# EAGLE board Esquema da PCB (EAGLE 9.5.1)
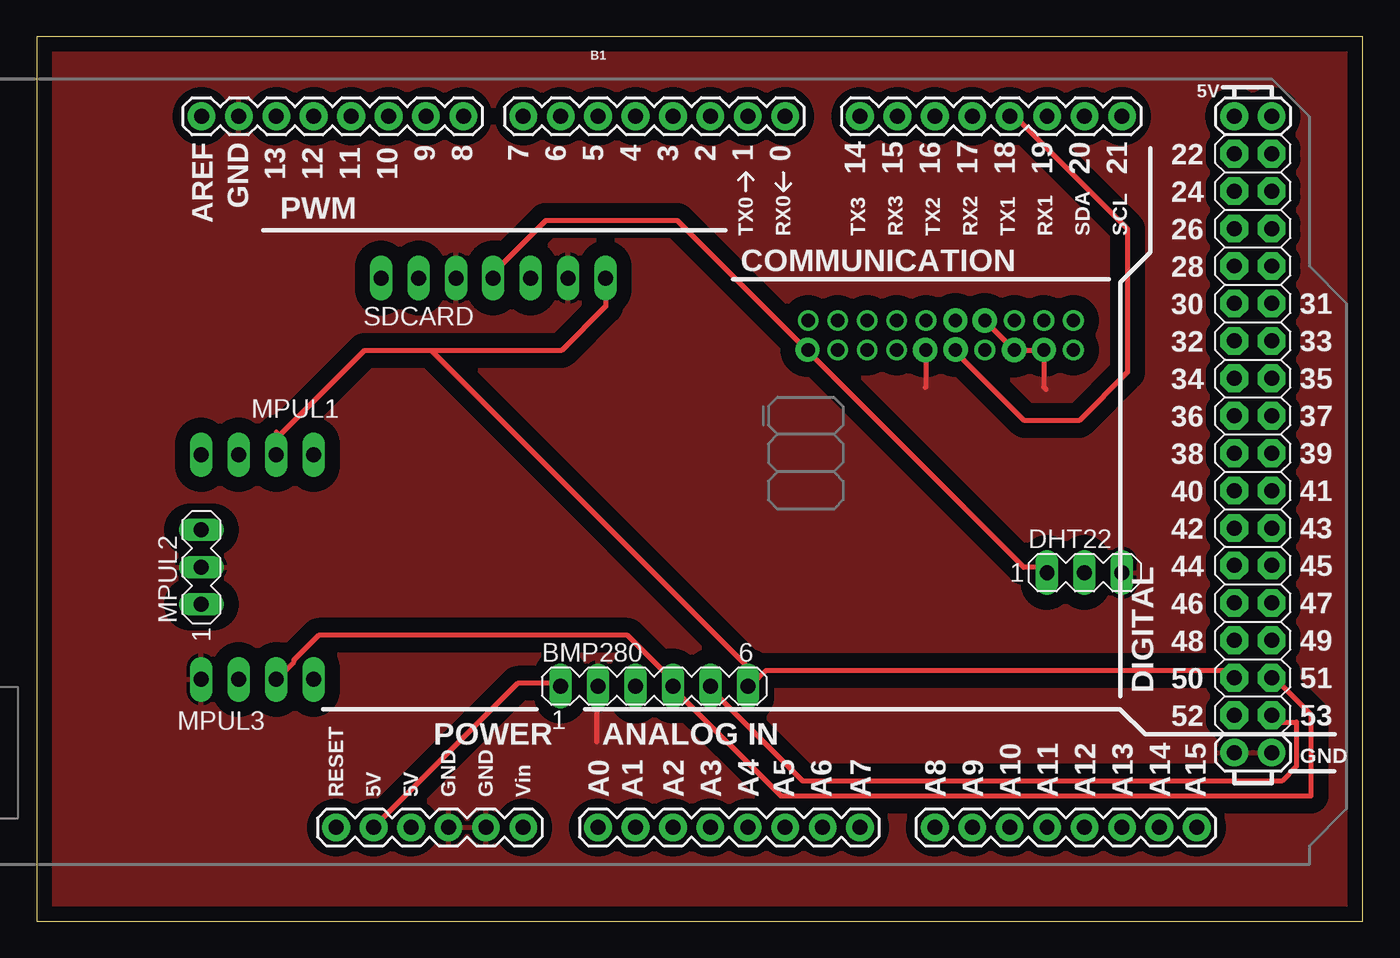
[diagram p0: board, top side]
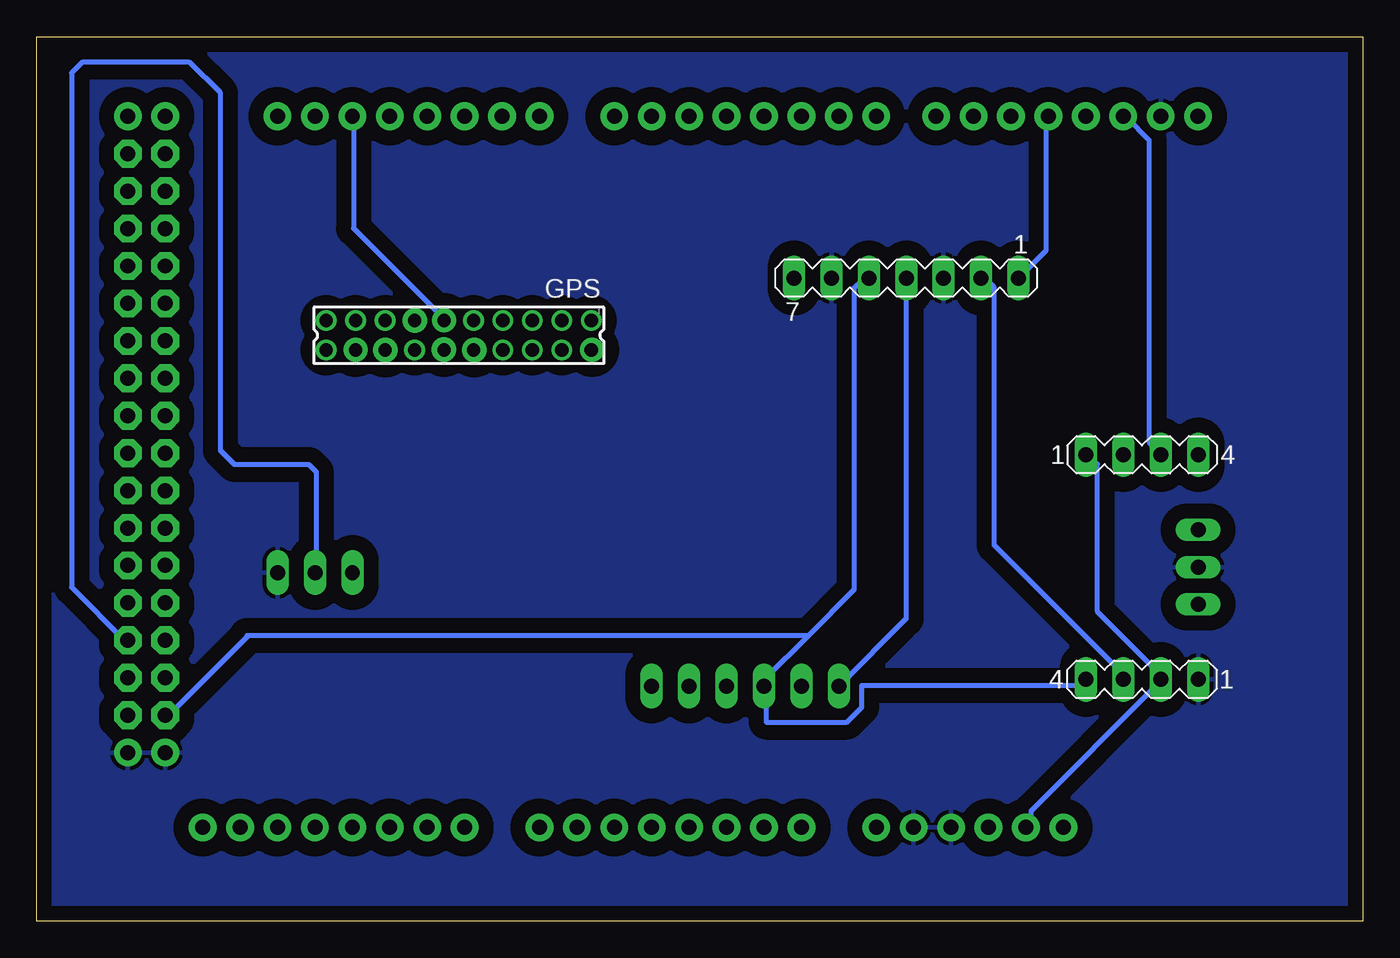
[diagram p1: board, bottom side, seen from below]

Size 90 x 60 mm. Coordinates in mm from the lower left corner, seen from the top.
Outline: 0,0 90,0 90,60 0,60 0,0
Copper layers (1*16): Top 0.035mm / dielectric 1.5mm / Bottom 0.035mm
Design rules "default": minimum track width 6mil, minimum drill 0.35mm, track to track 6mil, track to pad 6mil, pad to pad 6mil, via to via 6mil, smd to smd 6mil, copper to edge 40mil, drill to drill 6mil, minimum pad ring 10mil, minimum via ring 8mil, stop-mask expansion 4mil, vias tented up to drill 0mil, thermal gap 10mil
Net classes: 0 default: width 0.34 mm, clearance 0.4 mm

## Footprints (pad centres in the part's own frame; a part is rotated, then mirrored left to right if it is on the bottom)
ARDUINO_MEGA = drill 1.016 pad 1.88: 0 13.97,24.13; 1 11.43,24.13; 2 8.89,24.13; 3 6.35,24.13; 3.3V -13.97,-24.13; 4 3.81,24.13; 5 1.27,24.13; 5V@0 -11.43,-24.13; 5V@1 44.45,24.13; 5V@2 46.99,24.13; 6 -1.27,24.13; 7 -3.81,24.13; 8 -7.874,24.13; 9 -10.414,24.13; 10 -12.954,24.13; 11 -15.494,24.13; 12 -18.034,24.13; 13 -20.574,24.13; 14 19.05,24.13; 15 21.59,24.13; 16 24.13,24.13; 17 26.67,24.13; 18 29.21,24.13; 19 31.75,24.13; 20 34.29,24.13; 21 36.83,24.13; A0 1.27,-24.13; A1 3.81,-24.13; A2 6.35,-24.13; A3 8.89,-24.13; A4 11.43,-24.13; A5 13.97,-24.13; A6 16.51,-24.13; A7 19.05,-24.13; A8 24.13,-24.13; A9 26.67,-24.13; A10 29.21,-24.13; A11 31.75,-24.13; A12 34.29,-24.13; A13 36.83,-24.13; A14 39.37,-24.13; A15 41.91,-24.13; AREF -25.654,24.13; GND@0 -8.89,-24.13; GND@1 -6.35,-24.13; GND@2 44.45,-19.05; GND@3 46.99,-19.05; GND@4 -23.114,24.13; RESET -16.51,-24.13; VIN -3.81,-24.13 | drill 1.016 pad 1.88 octagon: 22 44.45,21.59; 23 46.99,21.59; 24 44.45,19.05; 25 46.99,19.05; 26 44.45,16.51; 27 46.99,16.51; 28 44.45,13.97; 29 46.99,13.97; 30 44.45,11.43; 31 46.99,11.43; 32 44.45,8.89; 33 46.99,8.89; 34 44.45,6.35; 35 46.99,6.35; 36 44.45,3.81; 37 46.99,3.81; 38 44.45,1.27; 39 46.99,1.27; 40 44.45,-1.27; 41 46.99,-1.27; 42 44.45,-3.81; 43 46.99,-3.81; 44 44.45,-6.35; 45 46.99,-6.35; 46 44.45,-8.89; 47 46.99,-8.89; 48 44.45,-11.43; 49 46.99,-11.43; 50 44.45,-13.97; 51 46.99,-13.97; 52 44.45,-16.51; 53 46.99,-16.51
MA06-1 = drill 1.016 long: 1 -6.35,0; 2 -3.81,0; 3 -1.27,0; 4 1.27,0; 5 3.81,0; 6 6.35,0
MA03-1 = drill 1.016 long: 1 -2.54,0; 2 0,0; 3 2.54,0
87758-2016 = drill 0.9 pad 1.27: 1 -9,-1; 2 -9,1; 3 -7,-1; 4 -7,1; 5 -5,-1; 6 -5,1; 7 -3,-1; 8 -3,1; 9 -1,-1; 10 -1,1; 11 1,-1; 12 1,1; 13 3,-1; 14 3,1; 15 5,-1; 16 5,1; 17 7,-1; 18 7,1; 19 9,-1; 20 9,1
MA04-1 = drill 1.016 long: 1 -3.81,0; 2 -1.27,0; 3 1.27,0; 4 3.81,0
MA07-1 = drill 1.016 long: 1 -7.62,0; 2 -5.08,0; 3 -2.54,0; 4 0,0; 5 2.54,0; 6 5.08,0; 7 7.62,0

## Placement (x,y rotation side)
B1  ARDUINO_MEGA_R3FULL  [ARDUINO_MEGA]  36.83,30.48 0 top
BMP280  [MA06-1]  41.91,15.94 0 top
DHT22  [MA03-1]  71.12,23.65 0 top
GPS  87758-2016  [87758-2016]  61.36,39.75 180 bottom
MPUL1  [MA04-1]  14.98,31.64 0 bottom
MPUL2  [MA03-1]  11.17,24.02 90 top
MPUL3  [MA04-1]  14.98,16.4 180 bottom
SDCARD  [MA07-1]  30.99,43.63 180 bottom

## Library data of the parts
B1 = SparkFun-Boards
BMP280 DHT22 MPUL1-MPUL3 SDCARD = con-lstb; OC_FARNELL: unknown; OC_NEWARK: unknown
GPS = con-molex; MF: MOLEX; MPN: 87758-2016; OC_FARNELL: 7472374; OC_NEWARK: 25M5677

## Nets
GND: B1.GND@0 B1.GND@1 B1.GND@2 B1.GND@3 B1.GND@4 BMP280.2 DHT22.3 GPS.10 GPS.13 GPS.16 GPS.18 MPUL2.2 MPUL3.1 SDCARD.3 SDCARD.6
N$1: B1.49 DHT22.2
N$2: B1.18 GPS.12
N$3: B1.11 SDCARD.1
N$4: B1.50 BMP280.6 MPUL1.2 SDCARD.7
N$5: B1.51 BMP280.4 MPUL3.3 SDCARD.2
N$6: B1.52 BMP280.3 MPUL3.4 SDCARD.5
N$7: B1.3.3V BMP280.1 DHT22.1 GPS.2 MPUL1.1 MPUL3.2 SDCARD.4
N$8: B1.19 GPS.11
N$9: B1.53 BMP280.5
N$10: B1.13 MPUL1.3

## Tracks (layer width: path | path; a pad name or v marks a point on that pad's centre or on a via)
GND
  Top 0.34: BMP280.2 38,15.84 38,12.15 | GPS.13 GPS.16 GPS.18 68.36,36.23 68.5,36.08 | GPS.10 60.36,36.25 60.31,36.2
  pour Bottom (isolate 1.016): 0,59.69 90.17,59.69 90.17,1.27 88.9,0 1.27,0 0,1.27
  pour Top (isolate 1.016): 0.66,59.49 91.17,59.49 91.72,58.94 91.72,3.02 89.41,0.71 1.42,0.71 0.36,1.78 0.36,59.26 0.6,59.5 0.77,59.5
N$1
  Bottom 0.34: 71.5,23.5 DHT22.2 71.02,23.75 71.02,30.46 71.53,30.98 76.58,30.98 77.53,31.92 77.53,56.19 79.61,58.27 86.92,58.27 87.64,57.56 87.64,22.64 84,19 B1.49
N$2
  Top 0.34: GPS.12 62.5,38.5 67.05,33.95 70.75,33.95 74.03,37.23 74.03,46.97 66.5,54.5 B1.18
N$3
  Bottom 0.34: SDCARD.1 23,44 21.5,45.5 21.5,54.5 B1.11
N$4
  Top 0.34: 48,16 BMP280.6 | 49,16.5 49.5,17 81,17 B1.50 | 49,16.5 48.5,16 BMP280.6 | 26.79,38.71 35.6,38.71 38.6,41.71 SDCARD.7 | 26.79,38.71 22.22,38.71 16.25,32.73 | 16.25,33.18 16.25,32.73 | 16.25,32.73 MPUL1.2 | 26.79,38.71 49,16.5 | 49,16.5 BMP280.6
N$5
  Top 0.34: 16.12,16.53 MPUL3.3 17.46,17.61 17.46,17.72 19.13,19.39 40.11,19.39 43.5,16 BMP280.4 43.5,15.5 50.5,8.5 86.5,8.5 86.5,14 84,16.5 B1.51
  Bottom 0.34: SDCARD.2 25.5,43.5 25,43 25,25.5 16.5,17 16.5,16.5 MPUL3.3
N$6
  Top 0.34: 40.5,16.5 40.5,16 BMP280.3 41,15.5
  Bottom 0.34: MPUL3.4 19,16 34,16 34,14.5 35,13.5 40.5,13.5 40.5,15.5 BMP280.3 40.5,16 40.5,16.5 37.63,19.37 | 37.63,19.37 34.5,22.5 34.5,43 34,43.5 SDCARD.5 | B1.52 81,14 75.72,19.28 75.72,19.37 | 37.63,19.37 75.72,19.37 | 75.72,19.37 75.74,19.37
N$7
  Top 0.34: BMP280.1 35.37,16.13 32.63,16.13 23,6.5 B1.3.3V | DHT22.1 68.5,24 67,24 52.5,38.5 GPS.2 52,39 43.48,47.52 34.52,47.52 31,44 SDCARD.4
  Bottom 0.34: B1.3.3V 22.5,6.5 22.5,7.5 14,16 MPUL3.2 14,16.5 14,17 18,21 18,31 18.5,31.5 MPUL1.1 | BMP280.1 31,20.5 31,43.5 SDCARD.4
N$8
  Bottom 0.34: GPS.11 62.5,41 68.5,47 68.5,54.5 B1.19
N$9
  Top 0.34: BMP280.5 46,15.5 52,9.5 84.5,9.5 85.5,10.5 85.5,13.5 84,13.5 B1.53
N$10
  Bottom 0.34: MPUL1.3 14,32 14.5,32.5 14.5,53 16,54.5 B1.13
N$11  (via drill 0.35 pad 1.65)
  other vias: 52.32,38.77
N$12  (via drill 0.35 pad 1.65)
  other vias: 62.36,38.77
N$13  (via drill 0.35 pad 1.65)
  other vias: 60.3,38.76
N$14  (via drill 0.35 pad 1.65)
  other vias: 64.34,40.74
N$15  (via drill 0.35 pad 1.65)
  other vias: 66.34,38.75
N$16  (via drill 0.35 pad 1.65)
  other vias: 68.36,38.76
N$17  (via drill 0.35 pad 1.65)
  other vias: 62.36,40.77